# Altium PCB AT long bus (13.3 x 4.2 inches).PCBDOC
Units mil, origin at the board's own origin, x right, y up, seen from the top; angles counter-clockwise.
Board outline 2086 x 3347 mil, 2 copper layers (TopLayer, BottomLayer), stack 40.6 mil thick; 3 components, 5 nets, 43 pads, 0 vias.
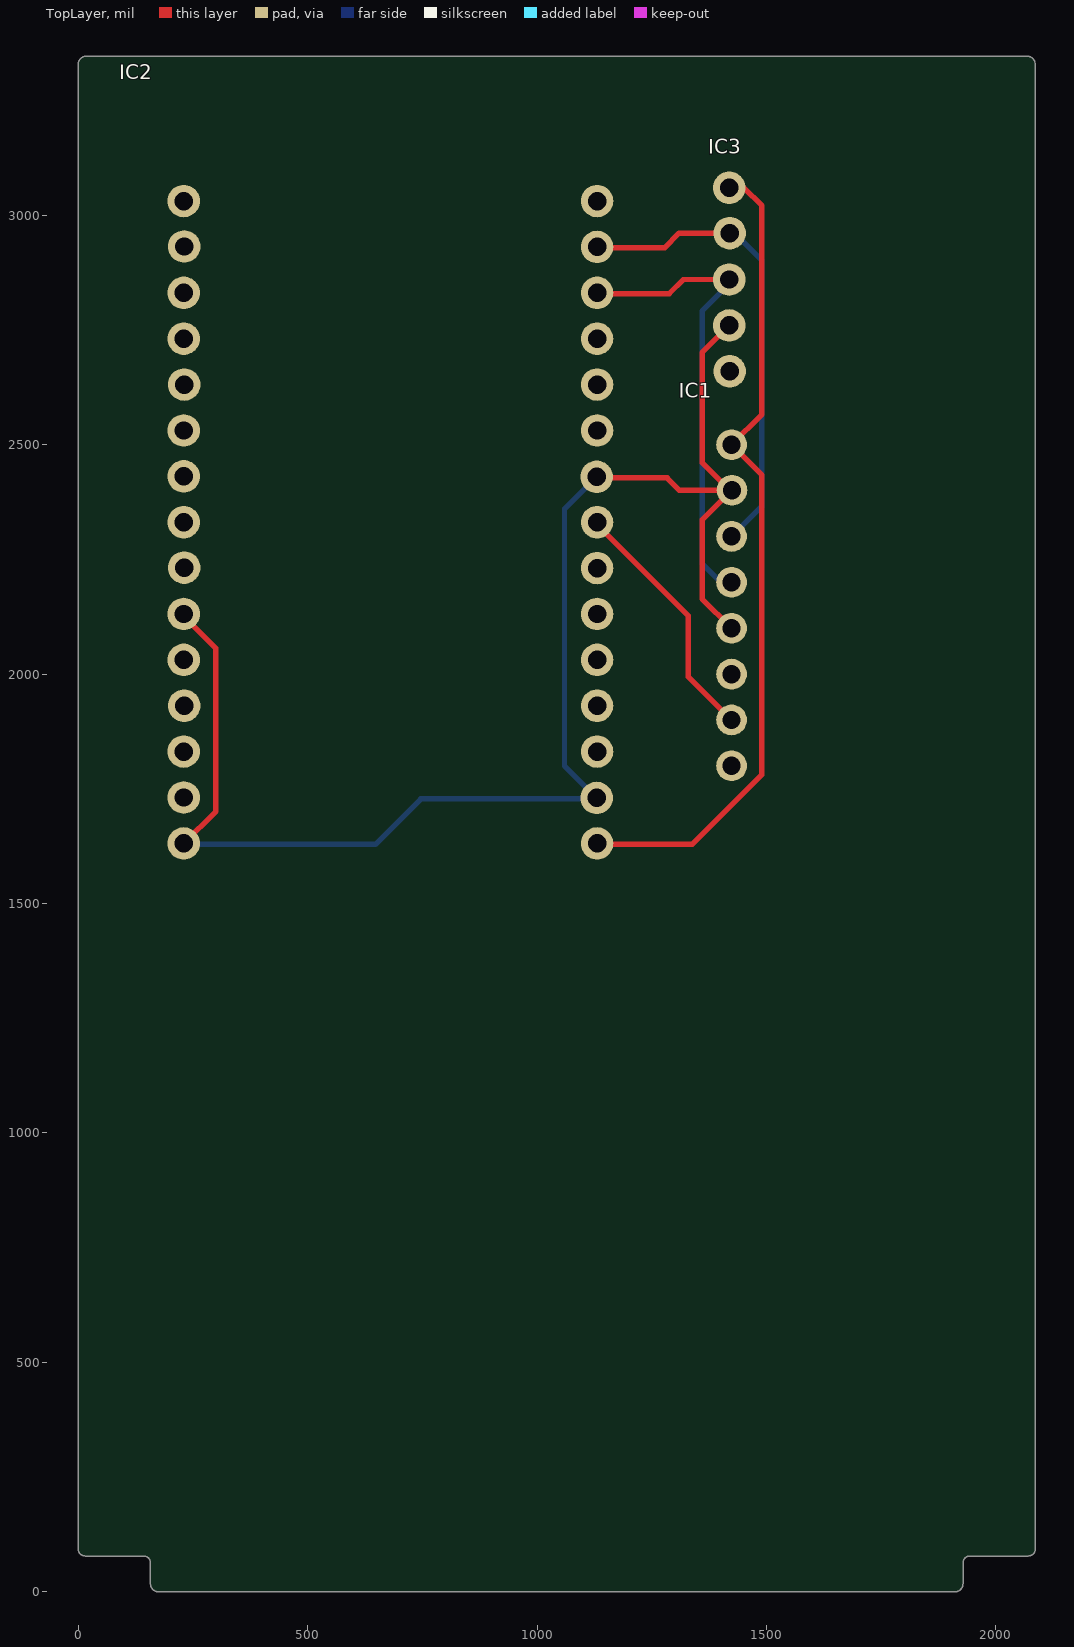
[diagram p0: TopLayer view]
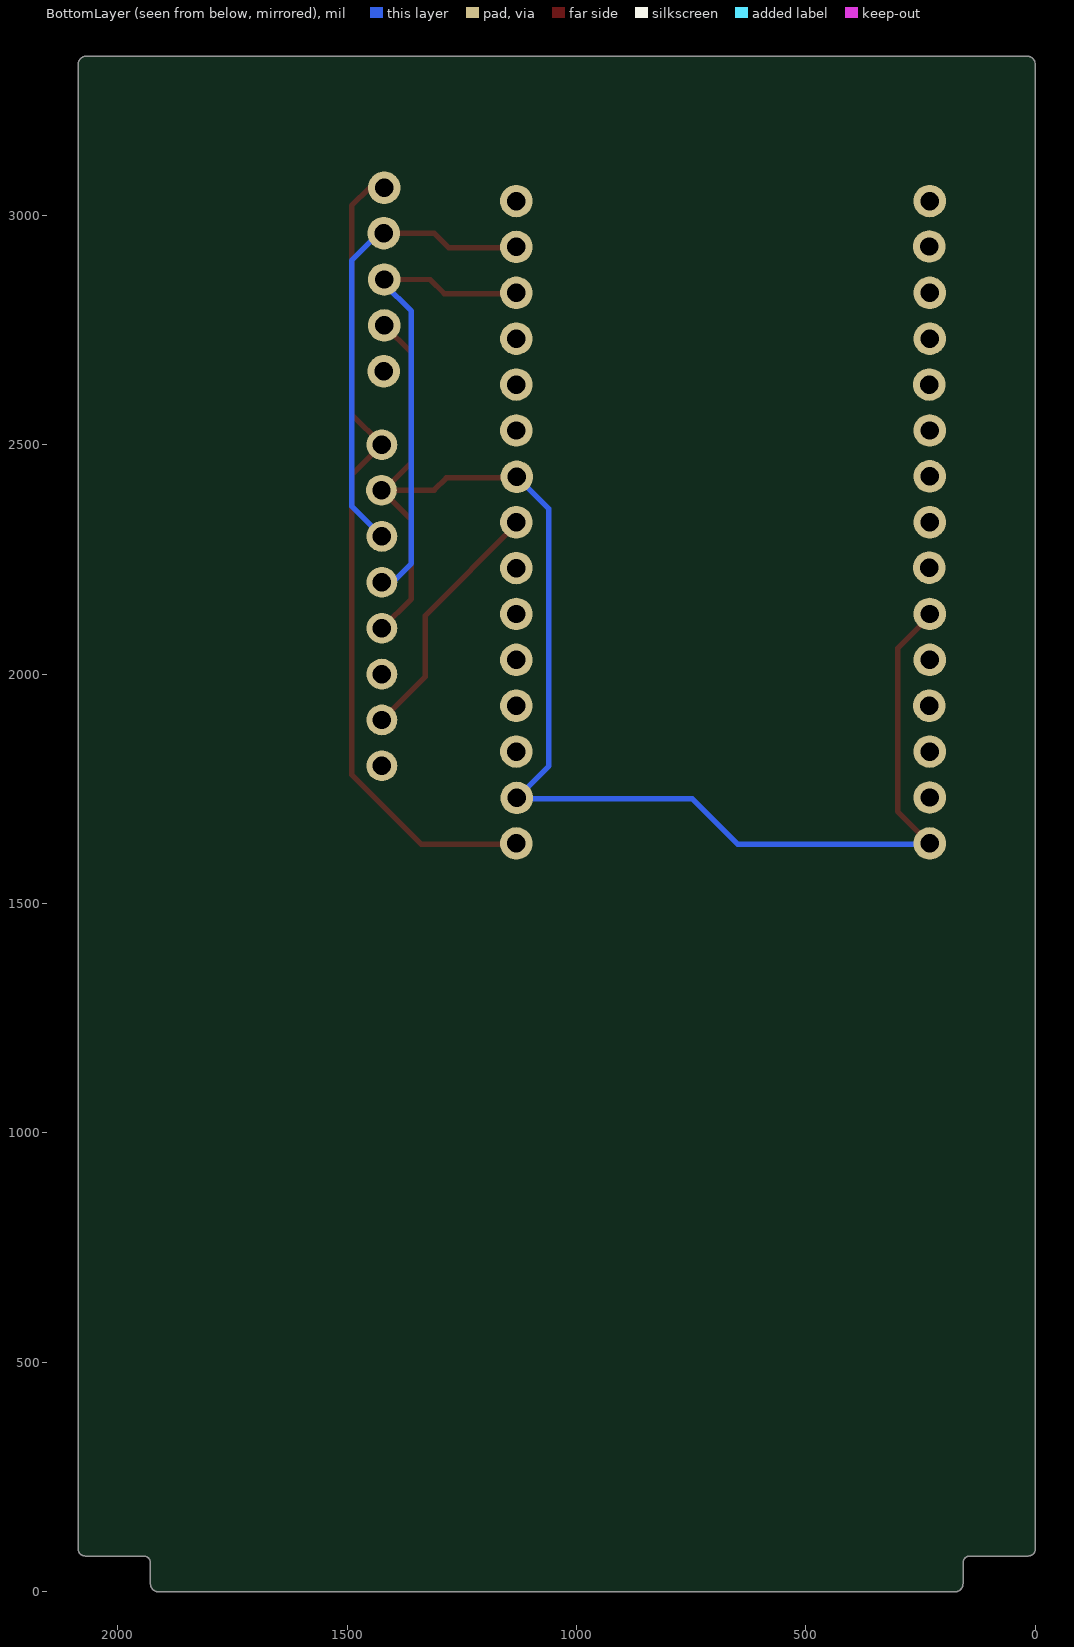
[diagram p1: BottomLayer view, seen from below]
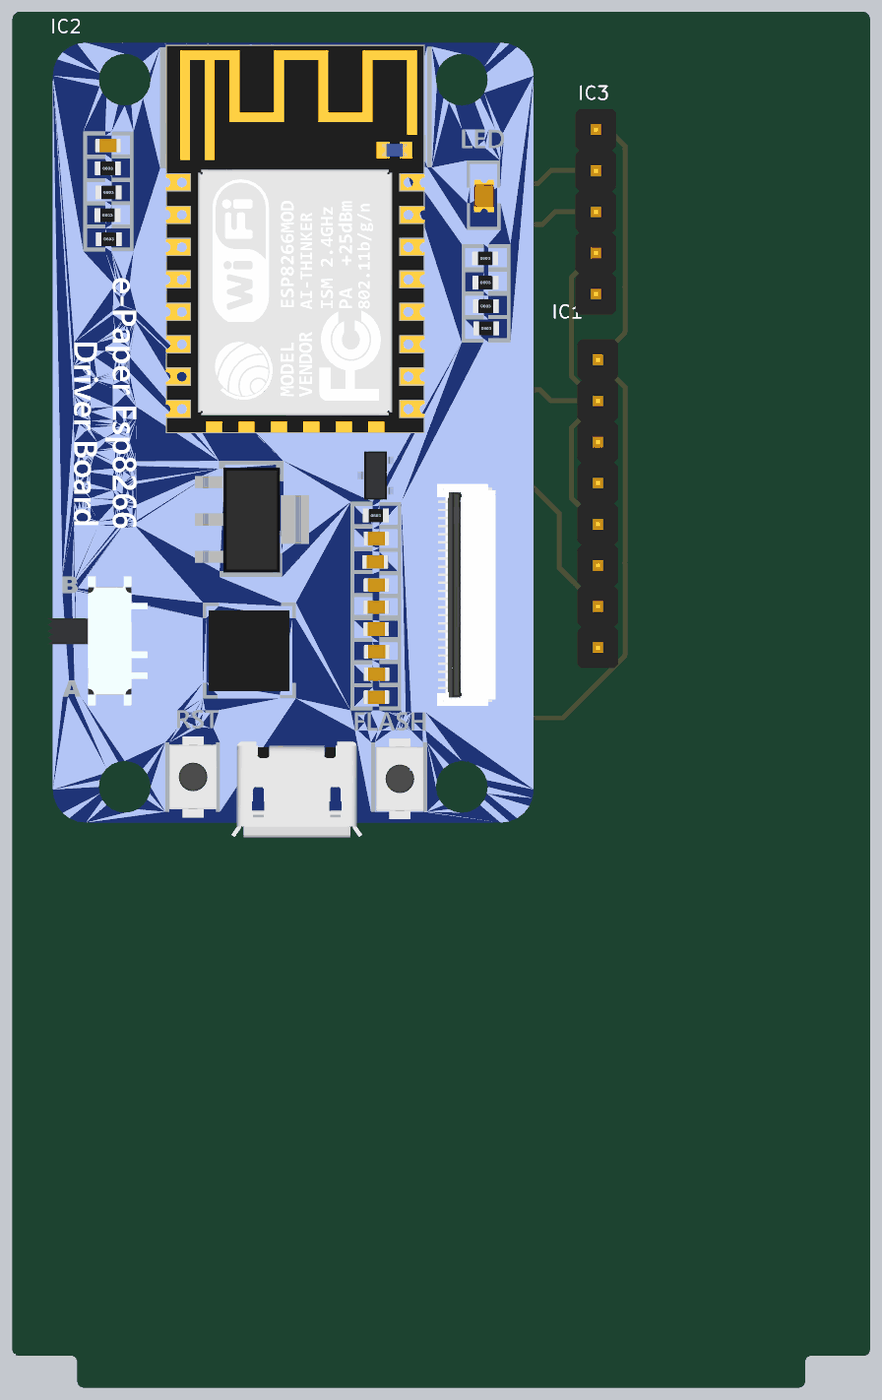
[diagram p2: 3D render of the assembled board from above, using the file's embedded part models]

## Layer stack, top to bottom
TopSolder: solder mask 0.4, Solder Resist, Dk 3.5
TopLayer: signal copper 1.4
Dielectric4: prepreg 12.6, FR-4, Dk 4.8
Dielectric5: core 12.6, FR-4, Dk 4.8
Dielectric6: prepreg 12.6, FR-4, Dk 4.8
BottomLayer: signal copper 1.4
BottomSolder: solder mask 0.4, Solder Resist, Dk 3.5

## Board outline
157.48,62.91 ccw(c142.48,62.91) 142.48,77.91 142.48,78 15,78 cw(c15,93) 0,93 0,3329 cw(c18,3329) 18,3347 2068,3347 cw(c2068,3329) 2086,3329 2086,3327 2086,93 cw(c2071,93) 2071,78 1943.52,78 1943.52,77.91 ccw(c1943.52,62.91) 1928.52,62.91 1928.52,17.52 cw(c1911,17.52) 1911,0 175,0 cw(c175,17.52) 157.48,17.52

## Design rules (kind name [scope] priority, off if disabled: settings)
Clearance [All] p1: gap=10 ignorepadtopadclearanceinfootprint=FALSE except(0: Arc-Hole Track-Hole SMDPad-Hole THPad-Hole Via-Hole Fill-Hole Poly-Hole Region-Hole Text-Hole)
FabricationTestPointUsage TestPointUsage [All] p1: valid=0 allowmultiple=FALSE
FabricationTestpoint Testpoint [All] p1: side=3 testpointundercomponent=TRUE minsize=40 maxsize=100 preferedsize=60 minholesize=20 maxholesize=40 preferedholesize=32 testpointgrid=1 allowsidetop=TRUE allowsidebottom=TRUE usegrid=TRUE gridtolerance=0.01
PasteMaskExpansion PasteMaskExpansion_1 [InComponent('P1')] p1: expansion=-150
PasteMaskExpansion [All] p2: expansion=0
PlaneClearance [All] p1: clearance=10
PolygonConnect [All] p1: connectstyle=Relief reliefconductorwidth=10 reliefentries=4 polygonreliefangle="90 Angle" airgapwidth=10
RoutingVias [All] p1: holewidth=28 width=50 viastyle="Through Hole" minholewidth=28 minwidth=50 maxholewidth=28 maxwidth=50
SilkToSolderMaskClearance SilkscreenOverComponentPads [IsPad] p1: minsilkscreentomaskgap=10 clearancetoexposedcopper=TRUE
SolderMaskExpansion [All] p1: expansion=2
Width [All] p1: maxlimit=20 minlimit=5 preferedwidth=10 minimp=50.000000 maximp=50.000000 favimp=50.000000
25 further rules are at their usual default settings.

## Components (designator, comment, footprint, x,y, rotation, side; value= is the part's Value field where it differs from the comment)
IC1 "CCS811" CCS811 1660,2141.26 r270 top
IC2 "ESP8266" ESP8266 683,2323.26 r0 top locked
IC3 "si7021" IS7021 1419,3060.26 r270 top

## Footprints (in the part's own frame and the unit in brackets; to place one, negate y for a bottom-side part, rotate by r counter-clockwise, add the part's x,y. Pads: shape width x height; smd on the part's side, far side on the other; paste and mask are expansions set on the pad)
CCS811 [mm]
  round 1.7 hole 1.02: 1(-9.119,-5.994) 2(-6.604,-5.969) 3(-4.039,-5.994) 4(-1.499,-5.994) 5(1.041,-5.994) 6(3.581,-5.994) 7(6.121,-5.994) 8(8.661,-5.994)
  body extent -11.11,-9.02 11.11,9.02, height 8.64
ESP8266 [mm]
  round 1.8 hole 1.02: 1(-11.506,17.983) 2(-11.481,15.469) 3(-11.506,12.903) 4(-11.506,10.363) 5(-11.481,7.823) 6(-11.506,5.283) 7(-11.506,2.743) 8(-11.506,0.203) 9(-11.481,-2.311) 10(-11.506,-4.877) 11(-11.506,-7.417) 12(-11.481,-9.957) 13(-11.506,-12.497) 14(-11.506,-15.037) 15(-11.506,-17.577) 16(11.379,-17.577) 17(11.354,-15.062) 18(11.379,-12.497) 19(11.379,-9.957) 20(11.379,-7.417) 21(11.379,-4.877) 22(11.379,-2.337) 23(11.379,0.203) 24(11.354,2.718) 25(11.379,5.283) 26(11.379,7.823) 27(11.379,10.363) 28(11.379,12.903) 29(11.379,15.443) 30(11.379,17.983)
  body extent -15.18,-25 14.86,24.1, height 8.76
IS7021 [mm]
  round 1.8 hole 1.02: 1(0,0) 2(2.515,0.025) 3(5.08,0) 4(7.62,0) 5(10.16,0.025)
  body extent -1.27,-1.27 11.43,7.73, height 8.64

## Nets (pads, with @x,y where several pads share a name; then routed paths per layer and width w, separated by ;. In a path a pad name is that pad's centre, name@x,y a point inside that pad or via, vN(x,y) a via of type N, cw(c..) or ccw(c..) an arc to the next point about the centre after c; other vN are vias at no path point)
GND: IC1.2 IC1.5 IC2.10 IC2.15 IC2.17 IC2.24 IC3.4 | length 3341
  TopLayer w10: IC2.15@230,1621.26 IC2.15
  TopLayer w11.81: IC2.15@227,1629.26 228,1629.26 IC2.15 300,1701.26 300,2056.26 IC2.10@227,2129.26 ; IC2.24@1127,2428.26 IC2.24@1127.5,2427.76 ; IC2.24 IC2.24@1127.5,2427.76 ; IC3.4 1360,2701.26 1360,2461.26 IC1.2@1420,2401.26 ; IC1.5 1360,2164.26 1360,2336.26 IC1.2 IC1.2@1420,2401.26 ; IC2.24@1127.5,2427.76 1283.5,2427.76 1310,2401.26 IC1.2@1420,2401.26
  BottomLayer w11.81: IC2.15@228,1629.26 648,1629.26 747,1728.26 IC2.17@1127,1728.26 ; IC2.24@1127.5,2427.76 1060,2360.26 1060,1800.26 IC2.17
NetIC1_1: IC1.1 IC2.16 IC3.1 | length 1806.8
  TopLayer w11.81: IC2.16@1128,1629.26 1338,1629.26 1490,1781.26 1490,2434.26 IC1.1 1490,2566.26 1490,3021.26 1451,3060.26 IC3.1
NetIC1_3: IC1.3 IC2.29 IC3.2 | length 1028.4
  TopLayer w11.81: IC2.29@1128,2929.26 1278,2929.26 1310,2961.26 IC3.2
  BottomLayer w11.81: IC3.2 1430,2961.26 1490,2901.26 1490,2366.26 IC1.3
NetIC1_4: IC1.4 IC2.28 IC3.3 | length 1028.3
  TopLayer w11.81: IC2.28@1128,2829.26 1288,2829.26 1319,2860.26 IC3.3
  BottomLayer w11.81: IC3.3 1419,2850.26 1360,2791.26 1360,2241.26 1401,2200.26 IC1.4
NetIC1_7: IC1.7 IC2.23 | length 551.6
  TopLayer w11.81: IC2.23@1128,2329.26 1330,2127.26 1330,1994.26 IC1.7
pads on no net: IC1.6 IC1.8 IC2.1 IC2.2 IC2.3 IC2.4 IC2.5 IC2.6 IC2.7 IC2.8 IC2.9 IC2.11 IC2.12 IC2.13 IC2.14 IC2.18 IC2.19 IC2.20 IC2.21 IC2.22 IC2.25 IC2.26 IC2.27 IC2.30 IC3.5

## Silkscreen, mask and mechanical layers (free items; w line width, h text height)
Mechanical1:
  lines w3.94: 142.48,77.91 cw(c142.48,62.91) 157.48,62.91 157.48,17.52 ccw(c175,17.52) 175,0 1911,0 ccw(c1911,17.52) 1928.52,17.52 1928.52,62.91 cw(c1943.52,62.91) 1943.52,77.91 ; 142.48,78 21,78 15,78 cw(c15,93) 0,93 0,3329 cw(c18,3329) 18,3347 2068,3347 cw(c2068,3329) 2086,3329 2086,3327 2086,93 cw(c2071,93) 2071,78 2065,78 1943.52,78